# EAGLE board REF_Brd (EAGLE 9.6.2)
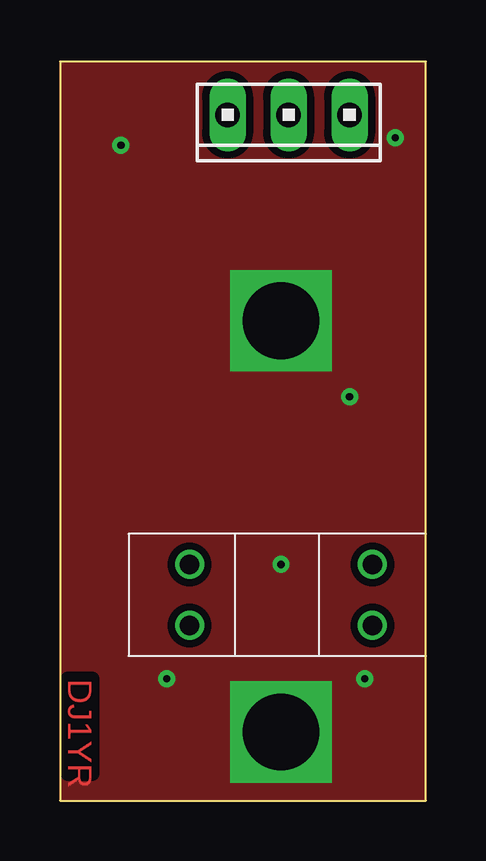
[diagram p0: board, top side]
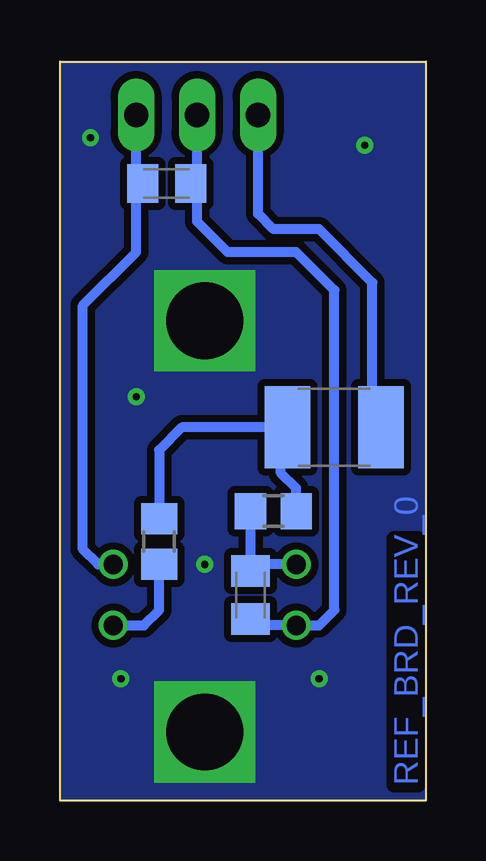
[diagram p1: board, bottom side, seen from below]

Size 15.24 x 30.8 mm. Coordinates in mm from the lower left corner, seen from the top.
Outline: 0,0 15.24,0 15.24,30.8 0,30.8 0,0
Copper layers (1*16): Top 0.035mm / dielectric 1.5mm / Bottom 0.035mm
Design rules "default *": minimum track width 6mil, minimum drill 0.35mm, track to track 6mil, track to pad 6mil, pad to pad 6mil, via to via 6mil, smd to smd 6mil, copper to edge 0mil, drill to drill 6mil, minimum pad ring 10mil, minimum via ring 8mil, stop-mask expansion 4mil, vias tented up to drill 0mil, thermal gap 10mil

## Footprints (pad centres in the part's own frame; a part is rotated, then mirrored left to right if it is on the bottom)
C0805K = smd 1.3 x 1.6: 1 -1,0; 2 1,0
R0805 = smd 1.3 x 1.5: 1 -0.95,0; 2 0.95,0
L1812 = smd 1.9 x 3.4: 1 -1.95,0; 2 1.95,0
10X03MTA = drill 1.016 long: 1 2.54,0; 2 0,0; 3 -2.54,0

## Placement (x,y rotation side)
E$1  [C0805K]  7.3,8.57 270 bottom
E$2  [R0805]  6.35,12.06 0 bottom
E$3  [R0805]  11.11,10.79 270 bottom
E$4  [L1812]  3.81,15.56 180 bottom
E$5  [10X03MTA]  9.53,28.57 180 top
E$6  [C0805K]  10.79,25.72 180 bottom

## Library data of the parts
E$1-E$4 E$6 = rcl
E$5 = con-amp

## Nets
S$1: E$5.2
S$4: E$5.3
S$8: E$5.1

## Tracks (layer width: path | path; a pad name or v marks a point on that pad's centre or on a via)
GND  (via drill 0.3, 3.2)
  other vias: 9.21,20 9.21,2.86 2.54,27.3 12.06,16.83 9.21,9.84 13.97,27.62 4.45,5.08 12.7,5.08
  pour Top (isolate 0.305): 0,30.8 15.24,30.8 15.24,0 0,0
  pour Bottom (isolate 0.305): 0,30.8 15.24,30.8 15.24,0 0,0
S$1  (via drill 0.8)
  Bottom 0.406: 7.3,7.62 7.3,7.3 v5.4,7.3 4.45,7.3 3.81,7.94 3.81,21.27 5.4,22.86 8.26,22.86 9.53,24.13 E$5.2
S$2
  Bottom 0.406: 5.4,12.06 5.4,13.02 6.03,13.65 6.03,15.56 10.16,15.56 11.11,14.61 11.11,11.75
S$4  (via drill 0.8)
  Bottom 0.406: E$5.3 12.06,22.86 14.29,20.64 14.29,10.48 13.65,9.84 v13.02,9.84
S$5  (via drill 0.8)
  Bottom 0.406: 7.3,9.84 7.3,12.06 | v5.4,9.84 7.3,9.84 | 7.3,9.84 7.3,9.53
S$8
  Bottom 0.406: 2.22,15.24 2.22,21.59 4.45,23.81 6.35,23.81 6.99,24.45 E$5.1
S$9  (via drill 0.8)
  Bottom 0.406: v13.02,7.3 11.75,7.3 11.11,7.94 11.11,9.84

## Text on the board
Top: DJ1YR
Bottom: REF_BRD_REV_0